# EAGLE board accel_v1.0 (EAGLE 5.11)
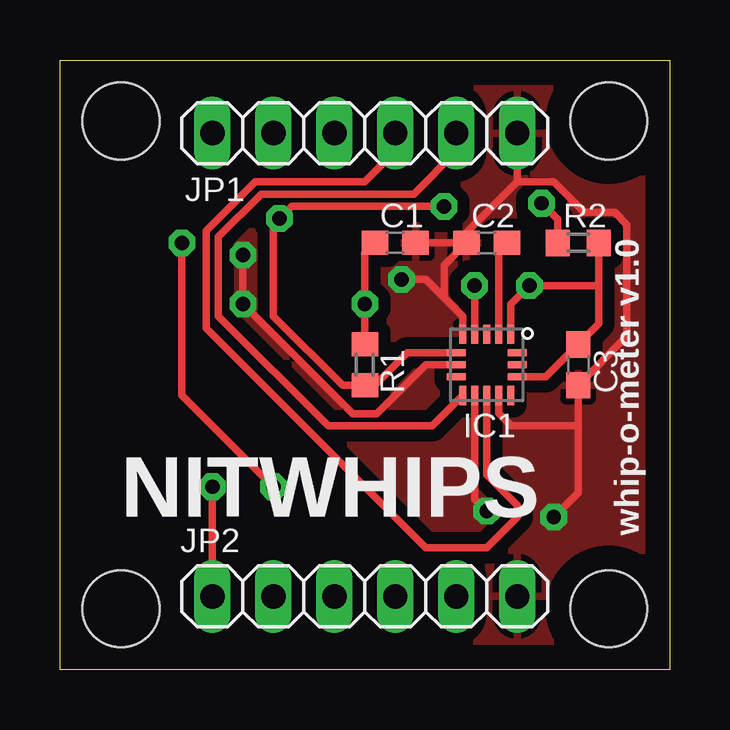
[diagram p0: board, top side]
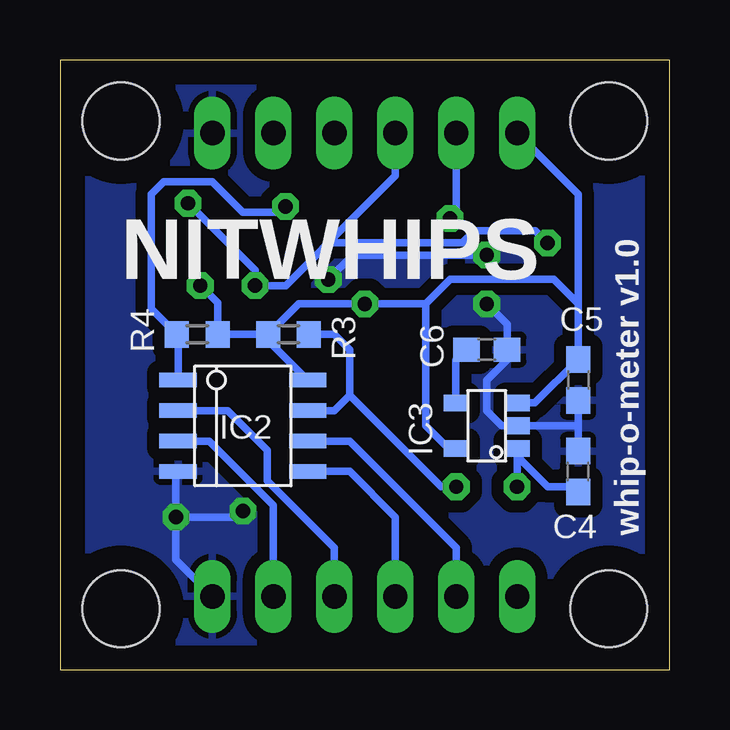
[diagram p1: board, bottom side, seen from below]

Size 25.4 x 25.4 mm. Coordinates in mm from the lower left corner, seen from the top.
Outline: 0,0 0,25.4 25.4,25.4 25.4,0 0,0
Copper layers (1*2+15*16): Top 0.0356mm / dielectric 0.5004mm / Route2 0.0356mm / dielectric 0.5004mm / Route15 0.0356mm / dielectric 0.5004mm / Bottom 0.0356mm
Design rules "ESKI_design_rules *": minimum track width 8mil, minimum drill 15mil, track to track 7mil, track to pad 7mil, pad to pad 7mil, via to via 7mil, smd to smd 6mil, copper to edge 40mil, drill to drill 8mil, minimum pad ring 10mil, minimum via ring 10mil, stop-mask expansion 4mil, vias tented up to drill 50mil, thermal gap 10mil
Holes 3.2 mm at 2.54,22.86 22.86,22.86 22.86,2.54 2.54,2.54

## Footprints (pad centres in the part's own frame; a part is rotated, then mirrored left to right if it is on the bottom)
C0603 = smd 1.1 x 1: 1 -0.85,0; 2 0.85,0
QFN-16 = smd 0.8 x 0.3: PIN1 -1.275,1; PIN2 -1.275,0.5; PIN3 -1.275,0; PIN4 -1.275,-0.5; PIN5 -1.275,-1; PIN9 1.275,-1; PIN10 1.275,-0.5; PIN11 1.275,0; PIN12 1.275,0.5; PIN13 1.275,1 | smd 0.3 x 0.8: PIN6 -0.5,-1.275; PIN7 0,-1.275; PIN8 0.5,-1.275; PIN14 0.5,1.275; PIN15 0,1.275; PIN16 -0.5,1.275
SO-8 = smd 0.6 x 1.55: 1 -1.905,-2.7; 2 -0.635,-2.7; 3 0.635,-2.7; 4 1.905,-2.7; 5 1.905,2.7; 6 0.635,2.7; 7 -0.635,2.7; 8 -1.905,2.7
SOT23-5 = smd 0.69 x 0.99: 1 -0.955,-1.295; 2 0,-1.295; 3 0.955,-1.295; 4 0.955,1.295; 5 -0.955,1.295
1X06 = drill 1.016 long: 1 -6.35,0; 2 -3.81,0; 3 -1.27,0; 4 1.27,0; 5 3.81,0; 6 6.35,0
R0603 = smd 1 x 1.1: 1 -0.85,0; 2 0.85,0

## Placement (x,y rotation side)
C1  0.1uF  [C0603]  13.97,17.78 0 top
C2  0.1uF  [C0603]  17.78,17.78 180 top
C3  4.7uF  [C0603]  21.59,12.7 270 top
C4  1uF  [C0603]  3.81,8.26 90 bottom
C5  1uF  [C0603]  3.81,12.06 270 bottom
C6  1uF  [C0603]  7.62,13.34 0 bottom
IC1  MMA8452Q  [QFN-16]  17.78,12.7 270 top
IC2  P82B96-PCA9600SO-8  [SO-8]  17.78,10.16 270 bottom
IC3  LP3985SOT23-5  [SOT23-5]  7.62,10.16 90 bottom
JP1  [1X06]  12.7,22.35 180 top
JP2  [1X06]  12.7,3.05 0 top
R1  4.7k  [R0603]  12.7,12.7 270 top
R2  4.7k  [R0603]  21.59,17.78 180 top
R3  10K  [R0603]  15.88,13.97 0 bottom
R4  10K  [R0603]  19.68,13.97 180 bottom

## Library data of the parts
C1-C6 R1-R4 = rcl
IC1 = eski-ic
IC2 IC3 = Sparky
JP1 JP2 = pinhead

## Nets
GND: C1.2 C2.2 C3.2 C4.2 C5.2 C6.2 IC1.PIN5 IC1.PIN7 IC1.PIN10 IC1.PIN12 IC2.4 IC3.2 JP1.1 JP2.6
INT1: IC1.PIN11 JP1.3
INT2: IC1.PIN9 JP1.2
N$8: C6.1 IC3.4
N$16: C2.1 IC1.PIN2
RX: IC2.2 JP2.4
RY: IC2.6 JP2.2
SCL: IC1.PIN4 IC2.7 JP1.4 R2.2 R3.2
SDA: IC1.PIN6 IC2.1 JP1.5 R1.2 R4.2
TX: IC2.3 JP2.5
TY: IC2.5 JP2.3
V+: C4.1 IC3.1 JP2.1
VCC: C1.1 C3.1 C5.1 IC1.PIN1 IC1.PIN14 IC2.8 IC3.3 IC3.5 JP1.6 R1.1 R2.1 R3.1 R4.1

## Tracks (layer width: path | path; a pad name or v marks a point on that pad's centre or on a via)
GND  (via drill 0.6)
  Top 0.305: IC1.PIN5 16.78,14.72 16,15.49 | 16,15.49 16,16.85 C2.2 16.51,17.78 | IC1.PIN7 15.24,12.7 13.21,10.67 12.19,10.67 v7.62,15.24 v7.62,17.27 | 16,15.49 15.24,16.26 v14.22,16.26 | 19.05,20.32 JP1.1 | 16.51,17.78 19.05,20.32 | 16.51,17.78 C1.2 | 21.59,10.16 21.59,7.37 v20.57,6.35 | 21.59,10.16 C3.2 23.62,13.88 23.62,18.54 23.11,19.05 21.84,19.05 20.57,20.32 19.05,20.32 | IC1.PIN12 18.28,10.68 18.8,10.16 21.59,10.16 | IC1.PIN10 17.28,7.1 v17.78,6.6
  Bottom 0.305: 3.81,10.16 C5.2 | C4.2 3.81,10.16 | 3.81,10.16 IC3.2 6.99,10.16 7.62,10.79 7.62,12.06 6.77,12.91 C6.2 6.77,14.39 v7.62,15.24 | JP2.6 20.57,4.57 v20.57,6.35 | v20.57,6.35 20.57,8.16 IC2.4 | v14.22,16.26 13.21,17.27 v7.62,17.27 | v17.78,6.6 18.03,6.35 v20.57,6.35
  pour Bottom (isolate 0.508): 0,25.4 0,0 25.4,0 25.4,25.4
  pour Top (isolate 0.508): 0,25.4 0,0 25.4,0 25.4,25.4
INT1
  Top 0.305: IC1.PIN11 17.78,8.13 19.05,6.86 19.05,6.35 17.78,5.08 15.24,5.08 6.1,14.22 6.1,18.29 8.13,20.32 12.7,20.32 13.97,21.59 JP1.3
INT2
  Top 0.305: IC1.PIN9 15.52,10.16 11.18,10.16 6.6,14.73 6.6,18.03 8.38,19.81 14.73,19.81 16.51,21.59 JP1.2
N$8
  Bottom 0.305: C6.1 8.91,12.89 IC3.4
N$16
  Top 0.305: C2.1 18.28,17.43 IC1.PIN2
RX
  Bottom 0.305: IC2.2 18.41,10.79 16.76,9.14 16.76,7.87 13.97,5.08 JP2.4
RY
  Bottom 0.305: JP2.2 8.89,5.08 13.34,9.53 IC2.6
SCL  (via drill 0.6)
  Top 0.305: v20.07,19.43 20.74,18.76 R2.2 | v8.89,7.62 5.08,11.43 v5.08,17.78 | IC1.PIN4 v17.28,15.99 v17.27,16
  Bottom 0.305: IC2.7 13.97,10.79 13.34,11.43 | 13.34,11.43 13.34,13.34 13.97,13.97 R3.2 | 13.34,11.43 9.53,7.62 v8.89,7.62 | v20.07,19.43 17.27,16.64 v17.27,16 16,16 14.73,17.27 14.22,17.78 | 14.22,17.78 8.64,17.78 8.13,18.29 5.59,18.29 v5.08,17.78 | JP1.4 11.43,20.57 14.22,17.78
SDA  (via drill 0.6)
  Top 0.305: IC1.PIN6 14.47,13.2 13.12,11.85 R1.2 11.77,11.85 8.89,14.73 8.89,18.54 v9.14,18.8 9.65,19.3 v16,19.3
  Bottom 0.305: IC2.1 20.48,13.91 R4.2 21.59,15.03 21.59,19.81 21.08,20.32 19.05,20.32 17.78,19.05 16.26,19.05 v16,19.3 | v9.14,18.8 8.89,19.05 JP1.5
TX
  Bottom 0.305: 19.68,9.53 IC2.3 19.18,9.53 16.51,6.86 JP2.5
TY
  Bottom 0.305: JP2.3 11.43,6.35 13.34,8.26 IC2.5
V+  (via drill 0.6)
  Top 0.305: JP2.1 v6.35,7.62
  Bottom 0.305: C4.1 4.03,7.62 5.08,7.62 6.33,8.87 IC3.1 6.35,9.18 v6.35,7.62
VCC  (via drill 0.6)
  Top 0.305: IC1.PIN14 20.24,12.2 C3.1 22.44,14.4 22.44,16 | C1.1 12.7,17.36 v12.7,15.24 R1.1 | IC1.PIN1 18.78,15.22 v19.56,16 22.44,16 | 22.44,16 R2.1
  Bottom 0.305: R3.1 R4.1 18.84,15.28 v19.56,16 | IC2.8 16.73,13.71 R3.1 | IC3.3 5.61,11.12 C5.1 3.81,15.24 | IC3.5 9.21,9.21 10.16,10.16 10.16,15.24 | R3.1 15.46,15.24 v12.7,15.24 10.16,15.24 | JP1.6 3.81,19.81 3.81,15.24 | 3.81,15.24 4.83,16.26 9.14,16.26 10.16,15.24

## Text on the board
tPlace: NITWHIPS | whip-o-meter v1.0
bPlace: NITWHIPS | whip-o-meter v1.0